# Altium PCB PDM.PcbDoc (part 4 of 4)
Units mm, origin at the board's own origin, x right, y up, seen from the top; angles counter-clockwise.
Board outline 150 x 150 mm, 2 copper layers (Top Layer, Bottom Layer), stack 1.58 mm thick; 183 components, 85 nets, 477 pads, 0 vias.
Unrouted connection lines stored in the file: 318.
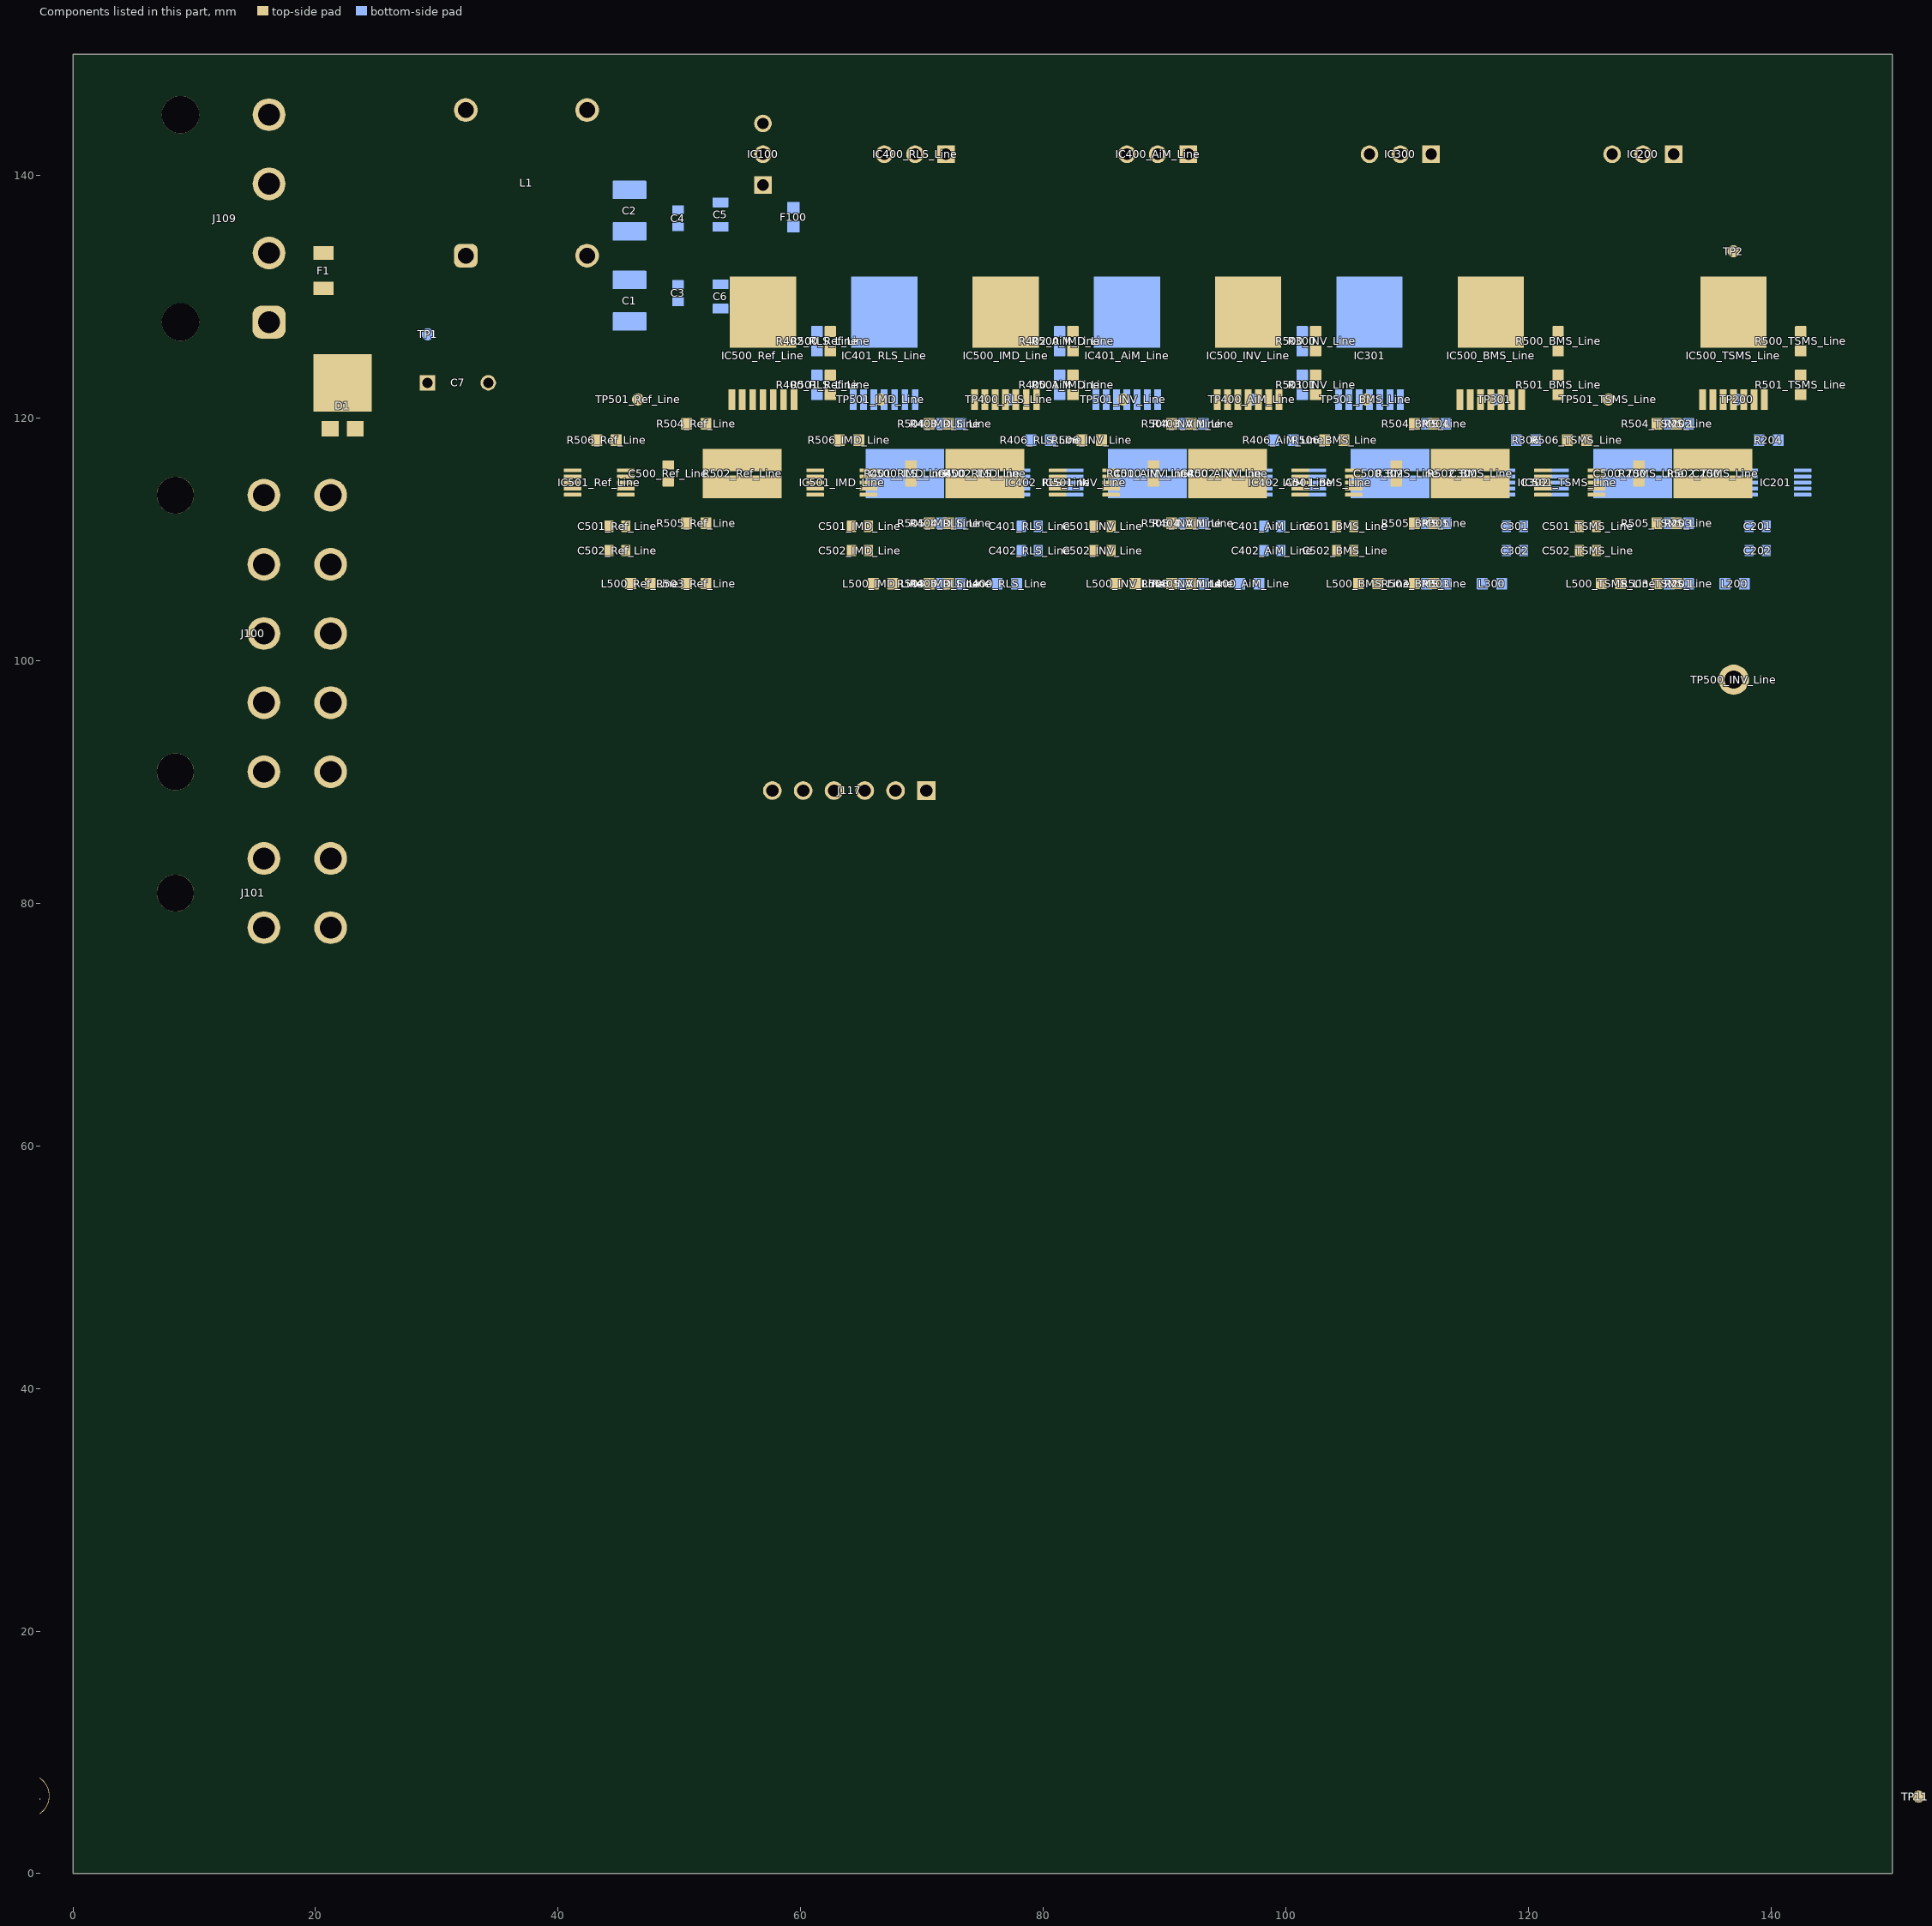
[diagram p3: the components of this part, seen from the top]

## Silkscreen, mask and mechanical layers (free items; w line width, h text height) (continued)
Mechanical 55:
  circle w0.013: c207.936,105.461 r3
  circle w0.013: c207.936,96.961 r4.1
  circle w0.006: c215.366,109.391 r0.003
  circle w0.006: c200.506,109.391 r0.003
  circle w0.006: c207.936,96.961 r0.003
  circle w0.006: c200.506,84.531 r0.003
  circle w0.006: c207.936,96.961 r0.003
  circle w0.006: c215.366,84.531 r0.003
  lines w0.013: 199.906,90.296 207.675,90.296 200.939,84.947 ; 199.906,105.561 204.738,105.561 cw(c207.936,105.461) 207.836,108.66 207.836,109.991 ; 199.949,84.754 cw(c200.506,84.531) 200.729,83.974 ; 199.949,109.169 ccw(c200.506,109.391) 200.729,109.949 ; 200.457,85.129 199.636,85.061 ; 200.457,108.793 199.636,108.861 ; 201.052,84.781 207.836,90.169 207.836,83.931 ; 201.104,84.482 201.036,83.661 ; 201.104,109.441 201.036,110.261 ; 208.036,83.931 208.036,90.169 214.821,84.781 ; 208.036,109.991 208.036,108.66 cw(c207.936,105.461) 211.135,105.561 215.966,105.561 ; 214.768,84.482 214.836,83.661 ; 214.768,109.441 214.836,110.261 ; 214.934,84.947 208.197,90.296 215.966,90.296 ; 215.144,83.974 cw(c215.366,84.531) 215.924,84.754 ; 215.144,109.949 ccw(c215.366,109.391) 215.924,109.169 ; 215.416,85.129 216.236,85.061 ; 215.416,108.793 216.236,108.861 ; 199.636,85.061 ccw(c201.036,85.061) 201.036,83.661 ; 199.636,85.061 199.636,108.861 ; 199.636,108.861 cw(c201.036,108.861) 201.036,110.261 ; 201.036,83.661 214.836,83.661 ; 201.036,110.261 214.836,110.261 ; 214.836,83.661 ccw(c214.836,85.061) 216.236,85.061 ; 214.836,110.261 cw(c214.836,108.861) 216.236,108.861 ; 216.236,85.061 216.236,108.861 ; 199.436,85.061 ccw(c201.036,85.061) 201.036,83.461 214.836,83.461 ccw(c214.836,85.061) 216.436,85.061 216.436,108.861 ccw(c214.836,108.861) 214.836,110.461 201.036,110.461 ccw(c201.036,108.861) 199.436,108.861 199.436,85.061 ; 199.906,90.625 204.525,94.343 cw(c207.936,96.961) 203.637,96.861 199.906,96.861 199.906,90.625 ; 199.906,97.061 203.637,97.061 cw(c207.936,96.961) 204.893,100 199.906,105.217 199.906,97.061 ; 200.045,105.361 205.038,100.138 cw(c207.936,96.961) 207.836,101.26 207.836,102.263 cw(c207.936,105.461) 204.738,105.361 200.045,105.361 ; 200.066,90.496 207.836,90.496 207.836,92.663 cw(c207.936,96.961) 204.65,94.188 200.066,90.496 ; 208.036,90.496 215.807,90.496 211.222,94.188 cw(c207.936,96.961) 208.036,92.663 208.036,90.496 ; 208.036,101.26 cw(c207.936,96.961) 210.834,100.138 215.828,105.361 211.135,105.361 cw(c207.936,105.461) 208.036,102.263 208.036,101.26 ; 210.979,100 cw(c207.936,96.961) 212.235,97.061 215.966,97.061 215.966,105.217 210.979,100 ; 211.347,94.343 ccw(c207.936,96.961) 212.235,96.861 215.966,96.861 215.966,90.625 211.347,94.343
Mechanical 56:
  circle w0.013: c207.936,108.061 r0.287
  circle w0.013: c207.936,101.861 r0.287
  circle w0.013: c203.036,107.461 r0.287
  circle w0.013: c203.036,101.861 r0.287
  circle w0.006: c207.936,96.961 r0.003
  lines w0.013: 199.636,95.271 201.636,95.271 201.636,87.061 ccw(c203.036,87.061) 203.036,85.661 203.786,85.661 203.786,86.661 cw(c204.436,86.661) 205.086,86.661 205.086,85.661 210.786,85.661 210.786,86.661 cw(c211.436,86.661) 212.086,86.661 212.086,85.661 212.836,85.661 ccw(c212.836,87.061) 214.236,87.061 214.236,95.271 216.236,95.271 216.236,99.662 215.436,99.662 215.436,108.361 216.236,108.361 216.236,108.861 ccw(c214.836,108.861) 214.836,110.261 214.086,110.261 214.086,109.261 cw(c213.436,109.261) 212.786,109.261 212.786,110.261 203.086,110.261 203.086,109.261 cw(c202.436,109.261) 201.786,109.261 201.786,110.261 201.036,110.261 ccw(c201.036,108.861) 199.636,108.861 199.636,95.271
Mechanical 57:
  lines w0.013: 215.018,104.791 215.018,105.831 ; 215.018,104.791 216.668,105.831 ; 215.018,104.791 216.668,104.791 ; 215.018,105.831 216.668,105.831 ; 215.018,105.831 216.668,104.791 ; 216.668,104.791 216.668,105.831
Mechanical 58:
  lines w0.013: 215.243,105.061 215.243,105.561 ; 215.243,105.061 216.443,105.061 ; 215.243,105.061 216.443,105.561 ; 215.243,105.561 216.443,105.561 ; 215.243,105.561 216.443,105.061 ; 216.443,105.061 216.443,105.561
Mechanical 59:
  circle w0.006: c215.843,105.311 r0.003
  lines w0.013: 215.496,105.311 216.191,105.311 ; 215.496,105.148 cw(c215.496,105.311) 215.496,105.474 216.191,105.474 cw(c216.191,105.311) 216.191,105.148 215.496,105.148
Mechanical 60:
  lines w0.013: 215.243,105.561 215.052,105.561 215.243,105.561 ; 215.243,105.561 215.117,105.561 215.243,105.561
Mechanical 61:
  lines w0.013: 215.496,105.148 cw(c215.496,105.311) 215.496,105.474 216.191,105.474 cw(c216.191,105.311) 216.191,105.148 215.496,105.148 ; 215.496,105.168 cw(c215.496,105.311) 215.496,105.454 216.191,105.454 cw(c216.191,105.311) 216.191,105.168 215.496,105.168
Mechanical 62:
  lines w0.013: 215.496,105.168 cw(c215.496,105.311) 215.496,105.454 216.191,105.454 cw(c216.191,105.311) 216.191,105.168 215.496,105.168
Mechanical 63:
  circle w0.006: c215.843,105.311 r0.003
  lines w0.013: 215.532,105.311 216.155,105.311 ; 215.532,105.278 cw(c215.532,105.311) 215.532,105.345 216.155,105.345 cw(c216.155,105.311) 216.155,105.278 215.532,105.278
Mechanical 64:
  lines w0.013: 215.554,105.345 215.583,105.345 215.554,105.345 ; 215.604,105.345 215.633,105.345 215.604,105.345 ; 215.654,105.345 215.683,105.345 215.654,105.345 ; 215.704,105.345 215.733,105.345 215.704,105.345 ; 215.754,105.345 215.783,105.345 215.754,105.345 ; 215.804,105.345 215.833,105.345 215.804,105.345 ; 215.854,105.345 215.883,105.345 215.854,105.345 ; 215.904,105.345 215.933,105.345 215.904,105.345 ; 215.954,105.345 215.983,105.345 215.954,105.345 ; 216.004,105.345 216.033,105.345 216.004,105.345 ; 216.054,105.345 216.083,105.345 216.054,105.345 ; 216.104,105.345 216.133,105.345 216.104,105.345
Mechanical 65:
  circle w0.013: c215.511,105.311 r0.044
  circle w0.013: c216.176,105.311 r0.044
  circle w0.006: c216.133,105.324 r0.003
  circle w0.006: c215.554,105.324 r0.003
  lines w0.013: 215.843,105.311 215.843,105.474
Mechanical 66:
  lines w0.013: 215.41,105.246 215.41,105.311 216.297,105.311 216.297,105.246 215.41,105.246
Mechanical 67:
  circle w0.006: c215.514,105.311 r0.003
  lines w0.013: 215.446,105.311 ccw(c215.514,105.311) 215.582,105.311 ccw(c215.514,105.311) 215.446,105.311
Mechanical 68:
  circle w0.006: c204.436,85.361 r0.003
  circle w0.006: c202.436,110.561 r0.003
  circle w0.006: c213.436,80.189 r0.003
  circle w0.006: c208.622,116.648 r0.003
  lines w0.013: 202.436,110.561 204.336,110.561 202.836,110.561 202.436,110.561 ; 204.436,85.361 206.336,85.361 204.836,85.361 204.436,85.361 ; 208.622,116.648 210.522,116.648 209.022,116.648 208.622,116.648 ; 213.436,80.189 215.336,80.189 213.836,80.189 213.436,80.189
Mechanical 69:
  circle w0.006: c207.936,12.061 r0.003
  circle w0.006: c207.936,12.061 r0.003
  lines w0.013: 199.436,7.061 216.436,17.061 ; 216.436,7.061 199.436,17.061 ; 199.436,17.061 216.436,17.061 ; 199.436,17.061 199.436,8.661 ccw(c201.036,8.661) 201.036,7.061 214.836,7.061 ccw(c214.836,8.661) 216.436,8.661 216.436,17.061 ; 199.436,17.061 201.386,17.061 201.386,10.611 ccw(c202.986,10.611) 202.986,9.011 212.886,9.011 ccw(c212.886,10.611) 214.486,10.611 214.486,17.061 216.436,17.061
Mechanical 70:
  circle w0.006: c207.936,12.061 r0.003
  lines w0.013: 203.936,7.061 204.436,7.561 207.936,7.561 211.436,7.561 211.936,7.061 ; 207.936,7.061 207.936,12.061 ; 199.436,8.661 ccw(c201.036,8.661) 201.036,7.061 214.836,7.061 ccw(c214.836,8.661) 216.436,8.661 216.436,15.311 214.486,15.311 214.486,10.611 cw(c212.886,10.611) 212.886,9.011 202.986,9.011 cw(c202.986,10.611) 201.386,10.611 201.386,15.311 199.436,15.311 199.436,8.661
Mechanical 71:
  circle w0.006: c207.936,12.061 r0.003
  lines w0.013: 204.868,7.311 204.2,7.311 ; 207.936,7.561 207.936,9.011 ; 204.2,7.311 cw(c204.933,6.361) 204.933,7.561 210.939,7.561 cw(c210.939,6.361) 211.672,7.311 ; 204.2,7.311 cw(c203.467,8.261) 203.467,7.061 201.036,7.061 cw(c201.036,8.661) 199.436,8.661 199.436,15.311 201.386,15.311 201.386,10.611 ccw(c202.986,10.611) 202.986,9.011 212.886,9.011 ccw(c212.886,10.611) 214.486,10.611 214.486,15.311 216.436,15.311 216.436,8.661 cw(c214.836,8.661) 214.836,7.061 212.405,7.061 cw(c212.405,8.261) 211.672,7.311 ; 204.2,7.311 205.838,8.459 207.936,8.459 210.034,8.459 211.672,7.311
Mechanical 72:
  circle w0.013: c201.386,15.311 r6.539
  circle w0.006: c201.386,12.061 r0.003
  circle w0.006: c201.386,9.011 r0.003
  lines w0.013: 201.386,13.561 ccw(c201.386,15.311) 201.386,17.061 ; 201.386,10.611 201.386,15.311 201.386,10.611
Mechanical 73:
  circle w0.013: c216.436,15.311 r1.25
  circle w0.013: c216.436,15.311 r1.3
  circle w0.006: c216.436,12.061 r0.003
  lines w0.013: 216.436,13.761 ccw(c216.436,15.311) 216.436,16.861 ; 216.436,8.661 216.436,15.311 216.436,8.661
Mechanical 74:
  circle w0.013: c216.436,15.311 r1.3
  circle w0.006: c216.436,12.061 r0.003
  circle w0.006: c216.436,15.311 r0.003
  circle w0.006: c216.436,15.311 r0.003
  circle w0.006: c216.436,15.311 r0.003
  lines w0.013: 216.295,14.07 cw(c216.436,14.211) 216.295,14.353 ; 216.295,15.17 ccw(c216.436,15.311) 216.578,15.17 ; 216.295,15.453 cw(c216.436,15.311) 216.578,15.453 ; 216.436,13.761 ccw(c216.436,15.311) 216.436,16.861 ; 216.436,13.929 216.436,16.694 ; 216.436,14.734 ccw(c216.436,14.534) 216.236,14.534 ccw(c216.436,14.534) 216.436,14.334 ; 216.436,15.889 ccw(c216.436,16.089) 216.636,16.089 ccw(c216.436,16.089) 216.436,16.289 ; 216.578,16.27 ccw(c216.436,16.411) 216.578,16.553 ; 216.436,14.334 216.436,16.289 ; 216.436,14.334 216.436,16.289 ; 216.436,8.661 216.436,15.311 216.436,8.661 ; 216.436,14.07 216.436,15.17 216.436,14.07 ; 216.436,14.534 216.436,16.089 216.436,14.534 ; 216.436,15.453 216.436,16.553 216.436,15.453
Mechanical 75:
  circle w0.006: c207.936,7.561 r0.003
  lines w0.013: 204.936,7.411 cw(c204.936,7.561) 204.936,7.711 ; 204.936,7.411 cw(c204.936,7.561) 204.936,7.711 ; 204.936,7.411 cw(c204.936,7.561) 204.936,7.711 ; 204.936,7.411 cw(c204.936,7.561) 204.936,7.711 ; 204.936,7.411 cw(c204.936,7.561) 204.936,7.711 ; 204.936,7.561 210.936,7.561 ; 204.936,7.561 210.936,7.561 ; 204.936,7.561 210.936,7.561 ; 204.936,7.561 210.936,7.561 ; 204.936,7.561 210.936,7.561 ; 204.936,7.561 210.936,7.561 ; 204.936,7.561 210.936,7.561 ; 204.936,7.561 210.936,7.561 ; 204.936,7.561 210.936,7.561 ; 204.936,7.561 210.936,7.561 ; 204.936,7.561 210.936,7.561 ; 210.936,7.411 ccw(c210.936,7.561) 210.936,7.711 ; 210.936,7.411 ccw(c210.936,7.561) 210.936,7.711 ; 210.936,7.411 ccw(c210.936,7.561) 210.936,7.711 ; 210.936,7.411 ccw(c210.936,7.561) 210.936,7.711 ; 210.936,7.411 ccw(c210.936,7.561) 210.936,7.711 ; 204.933,7.561 210.939,7.561 204.933,7.561
Mechanical 76:
  circle w0.006: c207.936,12.061 r0.003
  lines w0.013: 199.436,8.661 ccw(c201.036,8.661) 201.036,7.061 203.467,7.061 ccw(c203.467,8.261) 204.2,7.311 cw(c204.933,6.361) 204.786,7.552 ccw(c204.924,7.611) 204.924,7.461 210.948,7.461 ccw(c210.948,7.611) 211.086,7.552 cw(c210.939,6.361) 211.672,7.311 ccw(c212.405,8.261) 212.405,7.061 214.836,7.061 ccw(c214.836,8.661) 216.436,8.661 216.436,14.011 215.761,14.011 215.361,14.011 214.486,14.011 214.486,10.372 cw(c212.886,10.372) 212.936,8.773 202.936,8.773 cw(c202.986,10.372) 201.386,10.372 201.386,14.011 200.511,14.011 200.111,14.011 199.436,14.011 199.436,8.661 ; 199.586,8.661 ccw(c201.036,8.661) 201.036,7.211 203.467,7.211 ccw(c203.467,8.261) 204.109,7.43 cw(c204.933,6.361) 204.768,7.701 cw(c204.786,7.552) 204.924,7.611 210.948,7.611 cw(c211.086,7.552) 211.105,7.701 cw(c210.939,6.361) 211.764,7.43 ccw(c212.405,8.261) 212.405,7.211 214.836,7.211 ccw(c214.836,8.661) 216.286,8.661 216.286,13.861 215.761,13.861 215.361,13.861 214.636,13.861 214.636,10.372 cw(c212.922,10.372) 214.634,10.29 cw(c212.904,10.373) 214.627,10.198 cw(c212.886,10.375) 214.612,10.082 cw(c212.867,10.378) 214.412,9.515 cw(c212.9,10.361) 214.367,9.439 cw(c212.915,10.352) 214.324,9.375 214.319,9.368 cw(c212.928,10.343) 214.284,9.319 cw(c212.914,10.353) 214.244,9.268 cw(c212.901,10.364) 214.196,9.212 cw(c212.888,10.376) 214.135,9.147 cw(c212.874,10.389) 214.032,9.051 cw(c212.869,10.396) 213.721,8.835 cw(c212.882,10.372) 213.641,8.794 cw(c212.89,10.356) 213.574,8.763 cw(c212.897,10.34) 213.514,8.739 cw(c212.903,10.324) 213.459,8.718 213.457,8.718 cw(c212.886,10.372) 212.941,8.623 212.939,8.623 202.934,8.623 202.932,8.623 cw(c202.985,10.336) 202.849,8.628 cw(c202.987,10.354) 202.758,8.637 cw(c202.989,10.372) 202.642,8.657 cw(c202.993,10.391) 202.082,8.874 cw(c202.975,10.359) 202.007,8.922 cw(c202.965,10.344) 201.945,8.966 201.938,8.971 cw(c202.955,10.331) 201.89,9.008 cw(c202.966,10.344) 201.841,9.049 cw(c202.978,10.358) 201.786,9.099 cw(c202.99,10.371) 201.722,9.162 cw(c203.004,10.383) 201.629,9.268 cw(c203.01,10.389) 201.424,9.585 cw(c202.986,10.376) 201.385,9.667 cw(c202.97,10.369) 201.357,9.735 cw(c202.954,10.363) 201.334,9.795 cw(c202.938,10.357) 201.315,9.852 201.315,9.854 cw(c202.986,10.372) 201.236,10.372 201.236,13.861 200.511,13.861 200.111,13.861 199.586,13.861 199.586,8.661
Mechanical 77:
  circle w0.006: c207.936,12.061 r0.003
  lines w0.013: 199.436,8.661 ccw(c201.036,8.661) 201.036,7.061 203.467,7.061 ccw(c203.467,8.261) 204.2,7.311 cw(c204.933,6.361) 204.786,7.552 ccw(c204.924,7.611) 204.924,7.461 210.948,7.461 ccw(c210.948,7.611) 211.086,7.552 cw(c210.939,6.361) 211.672,7.311 ccw(c212.405,8.261) 212.405,7.061 214.836,7.061 ccw(c214.836,8.661) 216.436,8.661 216.436,14.011 215.761,14.011 215.361,14.011 214.486,14.011 214.486,10.372 cw(c212.886,10.372) 212.936,8.773 202.936,8.773 cw(c202.986,10.372) 201.386,10.372 201.386,14.011 200.511,14.011 200.111,14.011 199.436,14.011 199.436,8.661 ; 199.586,8.661 ccw(c201.036,8.661) 201.036,7.211 203.467,7.211 ccw(c203.467,8.261) 204.109,7.43 cw(c204.933,6.361) 204.768,7.701 cw(c204.786,7.552) 204.924,7.611 210.948,7.611 cw(c211.086,7.552) 211.105,7.701 cw(c210.939,6.361) 211.764,7.43 ccw(c212.405,8.261) 212.405,7.211 214.836,7.211 ccw(c214.836,8.661) 216.286,8.661 216.286,13.861 215.761,13.861 215.361,13.861 214.636,13.861 214.636,10.372 cw(c212.922,10.372) 214.634,10.29 cw(c212.904,10.373) 214.627,10.198 cw(c212.886,10.375) 214.612,10.082 cw(c212.867,10.378) 214.412,9.515 cw(c212.9,10.361) 214.367,9.439 cw(c212.915,10.352) 214.324,9.375 214.319,9.368 cw(c212.928,10.343) 214.284,9.319 cw(c212.914,10.353) 214.244,9.268 cw(c212.901,10.364) 214.196,9.212 cw(c212.888,10.376) 214.135,9.147 cw(c212.874,10.389) 214.032,9.051 cw(c212.869,10.396) 213.721,8.835 cw(c212.882,10.372) 213.641,8.794 cw(c212.89,10.356) 213.574,8.763 cw(c212.897,10.34) 213.514,8.739 cw(c212.903,10.324) 213.459,8.718 213.457,8.718 cw(c212.886,10.372) 212.941,8.623 212.939,8.623 202.934,8.623 202.932,8.623 cw(c202.985,10.336) 202.849,8.628 cw(c202.987,10.354) 202.758,8.637 cw(c202.989,10.372) 202.642,8.657 cw(c202.993,10.391) 202.082,8.874 cw(c202.975,10.359) 202.007,8.922 cw(c202.965,10.344) 201.945,8.966 201.938,8.971 cw(c202.955,10.331) 201.89,9.008 cw(c202.966,10.344) 201.841,9.049 cw(c202.978,10.358) 201.786,9.099 cw(c202.99,10.371) 201.722,9.162 cw(c203.004,10.383) 201.629,9.268 cw(c203.01,10.389) 201.424,9.585 cw(c202.986,10.376) 201.385,9.667 cw(c202.97,10.369) 201.357,9.735 cw(c202.954,10.363) 201.334,9.795 cw(c202.938,10.357) 201.315,9.852 201.315,9.854 cw(c202.986,10.372) 201.236,10.372 201.236,13.861 200.511,13.861 200.111,13.861 199.586,13.861 199.586,8.661
Mechanical 78:
  circle w0.006: c147.449,-4.488 r0.003
  circle w0.006: c147.449,-4.488 r0.003
  lines w0.013: 144.149,-7.238 150.749,-1.738 ; 144.149,-7.238 150.749,-7.238 ; 144.149,-7.238 144.149,-1.738 ; 144.149,-1.738 150.749,-1.738 ; 144.149,-1.738 150.749,-7.238 ; 150.749,-7.238 150.749,-1.738
Mechanical 79:
  circle w0.013: c150.349,-4.488 r0.08
  circle w0.013: c150.549,-4.488 r0.08
  circle w0.006: c147.449,-4.488 r0.003
Mechanical 80:
  circle w0.006: c178.889,181.961 r0.003
  circle w0.006: c178.889,181.961 r0.003
  lines w0.013: 178.689,180.561 cw(c178.889,180.561) 178.889,180.761 cw(c178.889,180.561) 179.089,180.561 ; 178.689,183.361 ccw(c178.889,183.361) 178.889,183.161 ccw(c178.889,183.361) 179.089,183.361 ; 178.889,180.361 178.889,183.561 178.889,180.361 ; 178.889,180.561 178.889,183.361 178.889,180.561
Mechanical 81:
  circle w0.013: c181.139,181.961 r0.65
  circle w0.013: c181.139,181.011 r0.125
  circle w0.013: c181.139,181.011 r0.125
  circle w0.013: c181.139,181.011 r0.375
  circle w0.013: c181.139,182.911 r0.125
  circle w0.013: c181.139,182.911 r0.125
  circle w0.013: c181.139,182.911 r0.375
  circle w0.013: c181.139,182.911 r0.375
  circle w0.013: c181.139,181.011 r0.375
  circle w0.013: c181.139,181.961 r0.475
  circle w0.006: c181.139,181.961 r0.003
  lines w0.013: 180.839,181.461 cw(c181.139,181.461) 181.439,181.461 ; 180.839,182.461 ccw(c181.139,182.461) 181.439,182.461 ; 180.939,180.561 cw(c181.139,180.561) 181.139,180.761 cw(c181.139,180.561) 181.339,180.561 ; 180.939,183.361 ccw(c181.139,183.361) 181.139,183.161 ccw(c181.139,183.361) 181.339,183.361 ; 181.039,181.679 ccw(c181.139,181.961) 181.039,182.244 ; 181.139,181.679 181.139,182.244 ; 181.139,181.461 181.139,182.461 ; 181.139,181.461 181.139,182.461 ; 181.139,181.461 181.139,182.461 ; 181.139,180.561 181.139,183.361 181.139,180.561
Mechanical 82:
  circle w0.013: c179.809,181.761 r1.2
  circle w0.006: c178.609,181.761 r0.003
  circle w0.006: c178.889,181.961 r0.003
  lines w0.013: 179.089,180.561 179.089,183.361 181.139,183.361 181.139,180.561 179.089,180.561
Mechanical 83:
  circle w0.013: c179.809,181.761 r1.2
  circle w0.013: c179.809,181.761 r1.15
  circle w0.006: c178.889,181.961 r0.003
Mechanical 84:
  circle w0.013: c179.809,181.761 r1.15
  circle w0.013: c179.809,181.761 r0.31
  circle w0.006: c178.889,181.961 r0.003
  lines w0.013: 178.859,181.751 179.059,181.751 179.059,181.771 178.859,181.771 178.859,181.751 ; 180.559,181.751 180.759,181.751 180.759,181.771 180.559,181.771 180.559,181.751
Mechanical 85:
  circle w0.013: c176.902,181.961 r0.2
  circle w0.013: c176.902,181.961 r1.55
  circle w0.013: c176.902,181.961 r0.2
  circle w0.013: c176.902,180.761 r0.2
  circle w0.013: c176.902,183.161 r0.2
  circle w0.013: c176.902,181.961 r1.2
  circle w0.006: c176.902,181.961 r0.003
Mechanical 86:
  circle w0.013: c177.202,181.961 r1.55
  circle w0.013: c177.202,181.961 r0.8
  circle w0.013: c177.202,181.961 r0.2
  circle w0.013: c177.202,181.961 r0.2
  circle w0.013: c177.202,181.961 r0.3
  circle w0.013: c177.202,183.161 r0.2
  circle w0.013: c177.202,180.761 r0.2
  circle w0.006: c177.202,181.961 r0.003
Mechanical 87:
  circle w0.013: c177.702,181.961 r0.2
  circle w0.006: c176.902,181.961 r0.003
  lines w0.013: 177.202,181.161 177.202,182.761 ; 178.202,181.161 178.202,182.761
Mechanical 88:
  circle w0.013: c179.369,181.961 r2.89
  circle w0.013: c179.369,181.961 r0.3
  circle w0.006: c179.369,181.961 r0.003
  lines w0.013: 176.78,181.871 ccw(c179.369,181.961) 179.279,179.373 ; 176.78,182.051 cw(c179.369,181.961) 179.279,184.55 ; 178.594,181.871 ccw(c179.369,181.961) 179.279,181.187 ; 178.594,182.051 cw(c179.369,181.961) 179.279,182.736 ; 179.279,179.987 cw(c179.369,180.273) 179.279,180.559 ; 179.279,183.364 cw(c179.369,183.65) 179.279,183.936 ; 179.459,179.373 ccw(c179.369,181.961) 181.957,181.871 ; 179.459,179.987 ccw(c179.369,180.273) 179.459,180.559 ; 179.459,181.187 ccw(c179.369,181.961) 180.143,181.871 ; 179.459,182.736 cw(c179.369,181.961) 180.143,182.051 ; 179.459,183.364 ccw(c179.369,183.65) 179.459,183.936 ; 179.459,184.55 cw(c179.369,181.961) 181.957,182.051 ; 179.369,179.373 179.369,179.987 179.369,179.373 ; 179.369,180.559 179.369,181.187 179.369,180.559 ; 179.369,182.736 179.369,183.364 179.369,182.736 ; 179.369,183.936 179.369,184.55 179.369,183.936
Mechanical 89:
  circle w0.013: c179.369,181.961 r1.55
  circle w0.006: c179.369,181.961 r0.003
Mechanical 90:
  circle w0.013: c179.369,181.961 r0.3
  circle w0.013: c179.369,181.961 r0.3
  circle w0.006: c179.369,181.871 r0.003
  circle w0.006: c179.369,181.961 r0.003
  lines w0.013: 179.369,179.961 179.369,181.711
Mechanical 91:
  circle w0.013: c179.699,181.961 r2.89
  circle w0.013: c179.699,181.961 r0.3
  circle w0.006: c179.699,181.961 r0.003
  lines w0.013: 177.123,181.689 ccw(c179.699,181.961) 179.609,179.373 ; 177.123,182.234 cw(c179.699,181.961) 179.609,184.55 ; 178.924,181.871 ccw(c179.699,181.961) 179.609,181.187 ; 178.924,182.051 cw(c179.699,181.961) 179.609,182.736 ; 179.412,181.871 cw(c179.699,181.961) 179.412,182.051 cw(c179.699,181.961) 179.824,182.234 cw(c179.699,181.961) 179.824,181.689 ; 179.573,181.689 ccw(c179.699,181.961) 179.985,181.871 ; 179.573,182.234 cw(c179.699,181.961) 179.985,182.051 ; 179.609,179.987 cw(c179.699,180.273) 179.609,180.559 ; 179.609,183.364 cw(c179.699,183.65) 179.609,183.936 ; 179.699,179.961 179.699,181.711 ; 179.789,179.373 ccw(c179.699,181.961) 182.274,181.689 ; 179.789,181.187 ccw(c179.699,181.961) 180.473,181.871 ; 179.789,183.364 ccw(c179.699,183.65) 179.789,183.936 ; 179.699,179.373 179.699,179.987 ; 179.699,179.373 179.699,179.987 ; 179.699,179.373 179.699,179.987 ; 179.699,180.559 179.699,181.187 ; 179.699,180.559 179.699,181.187 ; 179.699,180.559 179.699,181.187 ; 179.699,180.558 179.699,181.47 179.699,180.558 ; 179.699,180.713 179.699,181.622 179.699,180.713 ; 179.699,182.301 179.699,183.21 179.699,182.301 ; 179.699,182.453 179.699,183.365 179.699,182.453 ; 179.699,182.736 179.699,183.364 179.699,182.736 ; 179.699,183.936 179.699,184.55 179.699,183.936 ; 179.789,179.987 ccw(c179.699,180.273) 179.789,180.559 cw(c179.699,180.273) 179.789,179.987 ; 179.789,182.736 cw(c179.699,181.961) 180.473,182.051 ccw(c179.699,181.961) 179.789,182.736 ; 179.789,184.55 cw(c179.699,181.961) 182.274,182.234 ccw(c179.699,181.961) 179.789,184.55
Mechanical 92:
  circle w0.013: c179.949,183.161 r0.2
  circle w0.013: c179.949,180.761 r0.2
  circle w0.013: c179.949,180.761 r0.2
  circle w0.013: c179.949,181.961 r0.2
  circle w0.013: c179.949,181.961 r0.2
  circle w0.013: c179.949,181.961 r0.2
  circle w0.013: c179.949,181.961 r2.89
  circle w0.013: c179.949,181.961 r0.3
  circle w0.013: c179.949,181.961 r0.2
  circle w0.013: c179.949,183.161 r0.2
  circle w0.013: c179.949,181.961 r0.3
  circle w0.006: c179.949,181.961 r0.003
Mechanical 93:
  circle w0.006: c179.369,180.761 r0.003
  lines w0.013: 179.119,180.761 180.099,180.761 ; 179.699,180.761 179.949,180.761 179.699,180.761
Mechanical 94:
  circle w0.006: c180.839,181.961 r0.003
  circle w0.006: c179.639,180.761 r0.003
  circle w0.006: c178.439,181.961 r0.003
  circle w0.006: c176.137,181.961 r0.003
  lines w0.013: 174.658,181.961 176.737,181.961 ; 175.137,181.961 175.887,181.961 176.137,181.961 ; 176.96,181.961 179.039,181.961 ; 177.439,181.961 178.189,181.961 178.439,181.961 ; 178.16,180.761 180.239,180.761 ; 178.639,180.761 179.389,180.761 179.639,180.761 ; 179.36,181.961 181.439,181.961 ; 179.839,181.961 180.589,181.961 180.839,181.961
Mechanical 95:
  circle w0.006: c205.949,163.301 r0.003
  lines w0.013: 198.347,162.792 198.347,164.592 202.047,164.592 202.047,162.792 198.347,162.792 ; 200.527,163.872 201.197,163.872 201.197,164.542 200.527,164.542 200.527,163.872
Mechanical 96:
  circle w0.006: c205.949,163.301 r0.003
  circle w0.006: c202.047,163.692 r0.003
  lines w0.013: 201.907,163.252 201.907,164.132 ; 201.907,163.252 202.187,163.252 ; 201.907,163.252 201.907,164.132 ; 201.907,163.252 201.507,163.252 201.507,164.132 201.907,164.132 ; 201.907,163.252 202.187,164.132 ; 201.907,164.132 202.187,163.252 ; 201.907,164.132 202.187,164.132 ; 202.187,163.252 202.187,164.132 ; 198.347,162.792 198.347,164.592 202.047,164.592 202.047,162.792 198.347,162.792 ; 200.527,163.872 201.197,163.872 201.197,164.542 200.527,164.542 200.527,163.872
Mechanical 97:
  circle w0.013: c198.572,163.017 r0.135
  circle w0.013: c198.572,164.367 r0.135
  circle w0.006: c205.949,163.301 r0.003
  lines w0.013: 198.049,163.692 198.347,163.692 ; 198.347,162.792 198.347,164.592 202.047,164.592 202.047,164.132 201.507,164.132 201.507,163.252 202.047,163.252 202.047,162.792 198.347,162.792 ; 200.527,163.872 200.527,164.542 201.197,164.542 201.197,163.872 200.527,163.872
Mechanical 98:
  circle w0.006: c202.187,163.301 r0.003
  lines w0.013: 202.187,163.252 cw(c202.187,163.402) 202.187,163.552 ; 202.187,163.302 cw(c202.187,163.402) 202.187,163.502 ; 202.187,163.832 ccw(c202.187,163.982) 202.187,164.132 ; 202.187,163.882 ccw(c202.187,163.982) 202.187,164.082 ; 202.187,163.402 202.187,163.982 ; 202.187,163.402 202.187,163.982 ; 202.187,163.402 202.187,163.982 ; 202.187,163.402 202.187,163.982
Mechanical 101:
  circle w0.013: c207.936,96.961 r4.5
  circle w0.013: c207.936,96.961 r3.4
  circle w0.006: c207.936,96.961 r0.003
  lines w0.013: 206.826,99.641 207.936,96.961 207.122,96.148 ; 206.504,100.157 206.734,99.602 206.919,99.679 206.689,100.233 206.504,100.157
Mechanical 102:
  circle w0.013: c207.936,96.961 r1.4
  circle w0.013: c207.936,96.961 r1.2
  circle w0.013: c206.168,98.729 r0.175
  circle w0.013: c209.704,98.729 r0.175
  circle w0.013: c206.168,95.194 r0.175
  circle w0.013: c209.704,95.194 r0.175
  circle w0.006: c207.936,96.961 r0.003
  lines w0.013: 207.386,98.028 206.734,99.602 ; 207.571,98.105 206.919,99.679 ; 206.734,99.602 206.543,100.063 ccw(c207.936,96.961) 206.728,100.14 206.919,99.679 ; 206.734,99.602 206.919,99.679
Mechanical 103:
  circle w0.006: c207.936,96.961 r0.003
  lines w0.013: 207.3,97.598 ccw(c207.936,96.961) 208.573,96.325 ccw(c207.936,96.961) 207.3,97.598
Mechanical 104:
  circle w0.006: c207.936,96.961 r0.003
  lines w0.013: 206.753,93.731 ccw(c207.936,96.961) 209.119,93.731 ; 207.936,92.651 207.936,92.601 ; 207.936,93.271 207.936,93.321 ; 207.936,101.461 207.936,92.461 207.936,92.601 ; 207.936,92.601 207.936,92.961 207.936,93.321 ; 207.936,93.321 207.936,93.521 ; 207.936,93.521 207.936,93.521
Mechanical 105:
  circle w0.013: c207.936,96.961 r3.4
  circle w0.013: c207.936,96.961 r4.5
  circle w0.013: c207.936,92.961 r0.5
  circle w0.013: c207.936,96.961 r3.44
  circle w0.006: c207.936,96.961 r0.003
  lines w0.013: 206.122,92.842 207.844,97 ; 206.214,92.804 207.936,96.961 209.658,92.804 ; 208.029,97 209.751,92.842 ; 208.113,96.785 209.35,95.547 ; 204.758,95.753 cw(c207.936,96.961) 204.758,98.17 204.945,98.092 205.022,98.277 204.835,98.354 cw(c207.936,96.961) 206.543,100.063 206.621,99.876 206.806,99.952 206.728,100.14 cw(c207.936,96.961) 209.144,100.14 209.067,99.952 209.252,99.876 209.329,100.063 cw(c207.936,96.961) 211.038,98.354 210.851,98.277 210.927,98.092 211.114,98.17 cw(c207.936,96.961) 211.114,95.753 210.927,95.831 210.851,95.646 211.038,95.569 cw(c207.936,96.961) 209.329,93.86 209.252,94.047 209.067,93.971 209.144,93.783 cw(c207.936,96.961) 206.728,93.783 206.806,93.971 206.621,94.047 206.543,93.86 cw(c207.936,96.961) 204.835,95.568 205.022,95.646 204.945,95.831 204.758,95.753
Mechanical 106:
  circle w0.006: c206.659,94.139 r0.003
  circle w0.006: c207.844,97 r0.003
  lines w0.013: 206.553,94.121 cw(c206.621,94.047) 206.692,94.118 ; 206.621,94.047 206.543,93.86 ; 206.702,94.342 ccw(c206.772,94.413) 206.843,94.342 ; 206.772,94.413 207.309,95.71 206.543,93.86 ; 206.543,93.86 206.646,94.107 206.659,94.139 ; 206.543,93.86 206.122,92.843 206.543,93.86 ; 206.659,94.139 206.734,94.32 206.659,94.139
Mechanical 107:
  circle w0.013: c207.936,96.961 r4.3
  circle w0.013: c207.936,96.961 r3.6
  circle w0.006: c207.936,96.961 r0.003
  lines w0.013: 206.122,92.843 cw(c207.936,96.961) 209.75,92.843 ; 206.122,92.843 ccw(c207.936,96.961) 207.181,92.525 207.617,93.577 cw(c207.936,96.961) 206.728,93.783 206.838,94.05 206.655,94.131 206.122,92.843 ; 206.122,92.843 206.543,93.86 cw(c207.936,96.961) 204.835,95.568 205.022,95.646 204.945,95.831 204.758,95.753 cw(c207.936,96.961) 204.758,98.17 204.945,98.092 205.022,98.277 204.835,98.354 cw(c207.936,96.961) 206.543,100.063 206.621,99.876 206.806,99.952 206.728,100.14 cw(c207.936,96.961) 209.144,100.14 209.067,99.952 209.252,99.876 209.329,100.063 cw(c207.936,96.961) 211.038,98.354 210.851,98.277 210.927,98.092 211.114,98.17 cw(c207.936,96.961) 211.114,95.753 210.927,95.831 210.851,95.646 211.038,95.569 cw(c207.936,96.961) 209.329,93.86 209.75,92.843 ; 209.75,92.843 cw(c207.936,96.961) 208.691,92.525 208.256,93.577 ccw(c207.936,96.961) 209.144,93.783 209.034,94.05 209.217,94.131 209.75,92.843
Mechanical 108:
  circle w0.013: c207.936,92.961 r0.36
  circle w0.013: c207.936,92.961 r0.31
  circle w0.006: c207.936,96.961 r0.003
Mechanical 109:
  circle w0.013: c207.936,96.961 r0.3
  circle w0.006: c207.936,96.961 r0.003
Mechanical 110:
  circle w0.013: c207.936,96.961 r0.33
  circle w0.013: c207.936,96.961 r0.3
  circle w0.006: c207.936,96.961 r0.003
Mechanical 111:
  circle w0.013: c207.936,96.961 r0.25
  circle w0.006: c207.936,96.961 r0.003
  lines w0.013: 207.703,96.728 208.17,97.195
Mechanical 112:
  circle w0.006: c270.936,44.561 r0.003
  lines w0.013: 270.936,44.561 270.936,45.586 ; 270.936,48.072 270.936,48.116 ; 270.936,45.386 270.936,44.936 270.936,45.386 ; 270.936,45.386 270.936,45.614 270.936,45.686 ; 270.936,45.386 270.936,45.586 ; 270.936,45.586 270.936,46.061 ; 270.936,45.586 270.936,45.686 ; 270.936,45.586 270.936,45.686 ; 270.936,45.586 270.936,46.061 ; 270.936,45.686 270.936,46.061
Mechanical 113:
  circle w0.006: c270.936,44.561 r0.003
  lines w0.013: 270.936,43.509 270.936,45.614 ; 270.936,44.361 270.936,44.761 270.936,44.361
Mechanical 114:
  circle w0.006: c270.936,44.561 r0.003
  lines w0.013: 270.936,44.361 270.936,44.761 270.936,44.361
Mechanical 115:
  circle w0.013: c270.936,44.561 r1.125
  circle w0.013: c270.936,44.561 r1.5
  circle w0.006: c270.936,44.561 r0.003
  lines w0.013: 271.578,43.637 271.846,43.369 ; 271.86,43.92 272.129,43.652 ; 271.997,43.501 270.936,44.561 272.436,44.561
Mechanical 116:
  circle w0.013: c285.936,44.561 r1.275
  circle w0.006: c285.936,44.561 r0.003
  circle w0.006: c285.936,44.511 r0.003
  circle w0.006: c285.936,44.561 r0.003
  circle w0.006: c285.936,44.561 r0.003
  circle w0.006: c285.936,44.561 r0.003
  lines w0.013: 285.736,43.801 cw(c285.936,43.801) 285.936,44.001 cw(c285.936,43.801) 286.136,43.801 ; 285.736,45.322 ccw(c285.936,45.322) 285.936,45.122 ccw(c285.936,45.322) 286.136,45.322 ; 285.795,43.628 cw(c285.936,43.486) 286.078,43.628 ; 285.795,44.42 cw(c285.936,44.561) 285.795,44.703 ; 285.795,45.495 ccw(c285.936,45.636) 286.078,45.495 ; 285.936,43.204 285.936,45.919 ; 286.078,44.42 ccw(c285.936,44.561) 286.078,44.703 ; 285.936,43.345 285.936,44.42 285.936,43.345 ; 285.936,43.601 285.936,45.522 285.936,43.601 ; 285.936,43.801 285.936,45.322 285.936,43.801 ; 285.936,44.703 285.936,45.778 285.936,44.703
Mechanical 117:
  circle w0.013: c285.936,44.561 r1.039
  circle w0.006: c285.936,44.561 r0.003
  lines w0.013: 285.736,43.801 ccw(c285.936,43.801) 285.936,43.601 ; 285.736,45.322 cw(c285.936,45.322) 285.936,45.522 ; 285.795,43.345 ccw(c285.936,43.486) 286.078,43.345 ; 285.795,44.42 cw(c285.936,44.561) 285.795,44.703 ; 285.795,45.778 cw(c285.936,45.636) 286.078,45.778 ; 286.078,44.42 ccw(c285.936,44.561) 286.078,44.703 ; 286.136,43.801 cw(c285.936,43.801) 285.936,43.601 ; 286.136,45.322 ccw(c285.936,45.322) 285.936,45.522 ; 285.936,43.601 285.936,43.345 285.936,43.601 ; 285.936,44.164 285.936,43.801 285.936,44.164 ; 285.936,44.164 285.936,44.42 285.936,44.164 ; 285.936,44.959 285.936,44.703 285.936,44.959 ; 285.936,44.959 285.936,45.322 285.936,44.959 ; 285.936,45.522 285.936,45.778 285.936,45.522
Mechanical 118:
  circle w0.013: c286.436,44.561 r1.039
  circle w0.013: c286.436,44.561 r1.275
  circle w0.006: c286.436,44.561 r0.003
Mechanical 119:
  circle w0.013: c285.536,44.561 r0.8
  circle w0.006: c285.536,44.561 r0.003
  lines w0.013: 285.336,43.801 cw(c285.536,43.801) 285.536,44.001 cw(c285.536,43.801) 285.736,43.801 ; 285.336,45.322 ccw(c285.536,45.322) 285.536,45.122 ccw(c285.536,45.322) 285.736,45.322 ; 285.395,43.628 cw(c285.536,43.486) 285.678,43.628 ; 285.395,44.42 cw(c285.536,44.561) 285.395,44.703 ; 285.395,45.495 ccw(c285.536,45.636) 285.678,45.495 ; 285.678,44.42 ccw(c285.536,44.561) 285.678,44.703 ; 285.536,44.164 285.536,43.801 285.536,44.164 ; 285.536,44.164 285.536,44.42 285.536,44.164 ; 285.536,44.959 285.536,45.322 285.536,44.959 ; 285.536,44.959 285.536,44.703 285.536,44.959 ; 285.536,43.345 285.536,43.601 285.536,43.345 ; 285.536,45.522 285.536,45.778 285.536,45.522
Mechanical 120:
  circle w0.013: c283.536,44.561 r0.525
  circle w0.013: c283.536,44.561 r0.8
  circle w0.006: c283.536,44.561 r0.003
Mechanical 121:
  circle w0.013: c285.136,44.561 r0.35
  circle w0.013: c285.136,44.561 r0.525
  circle w0.006: c285.136,44.561 r0.003
Mechanical 122:
  circle w0.013: c282.786,44.561 r0.35
  circle w0.013: c282.786,44.561 r0.175
  circle w0.013: c282.786,44.561 r0.65
  circle w0.013: c282.786,44.561 r0.8
  circle w0.013: c282.786,44.561 r0.5
  circle w0.006: c282.786,44.561 r0.003
Mechanical 123:
  circle w0.013: c285.536,44.561 r1
  circle w0.013: c285.536,44.561 r0.8
  circle w0.006: c285.536,44.561 r0.003
  lines w0.013: 285.336,43.801 cw(c285.536,43.801) 285.536,44.001 cw(c285.536,43.801) 285.736,43.801 ; 285.336,45.322 ccw(c285.536,45.322) 285.536,45.122 ccw(c285.536,45.322) 285.736,45.322 ; 285.395,43.628 cw(c285.536,43.486) 285.678,43.628 ; 285.395,44.42 cw(c285.536,44.561) 285.395,44.703 ; 285.395,45.495 ccw(c285.536,45.636) 285.678,45.495 ; 285.678,44.42 ccw(c285.536,44.561) 285.678,44.703 ; 285.536,44.164 285.536,43.801 285.536,44.164 ; 285.536,44.164 285.536,44.42 285.536,44.164 ; 285.536,44.959 285.536,44.703 285.536,44.959 ; 285.536,44.959 285.536,45.322 285.536,44.959 ; 285.536,43.345 285.536,43.601 285.536,43.345 ; 285.536,44.381 285.536,44.741 285.536,44.381 ; 285.536,45.522 285.536,45.778 285.536,45.522
Mechanical 124:
  circle w0.013: c286.636,44.561 r0.55
  circle w0.013: c286.636,44.561 r0.85
  circle w0.013: c286.636,44.561 r1.05
  circle w0.013: c286.636,44.561 r0.6
  circle w0.013: c286.636,44.561 r0.8
  circle w0.013: c286.636,44.561 r1.235
  circle w0.013: c286.636,44.561 r1.1
  circle w0.006: c286.636,44.561 r0.003

## Text inside footprints (layer, text, board x,y; h text height)
C1: Bottom Overlay "C" at 47.155,130.557 h2 r90
C2: Bottom Overlay "C" at 44.615,136.199 h2 r270